# Altium PCB Gastroscopy-CutController.PcbDoc (part 3 of 3)
Units mm, origin at the board's own origin, x right, y up, seen from the top; angles counter-clockwise.
Board outline 69.5 x 69.5 mm, 4 copper layers (Top Layer, Layer 4 (GND), Layer 5 (PWR), Bottom Layer), stack 1.49 mm thick; 92 components, 63 nets, 304 pads, 96 vias.
Unrouted connection lines stored in the file: 142.
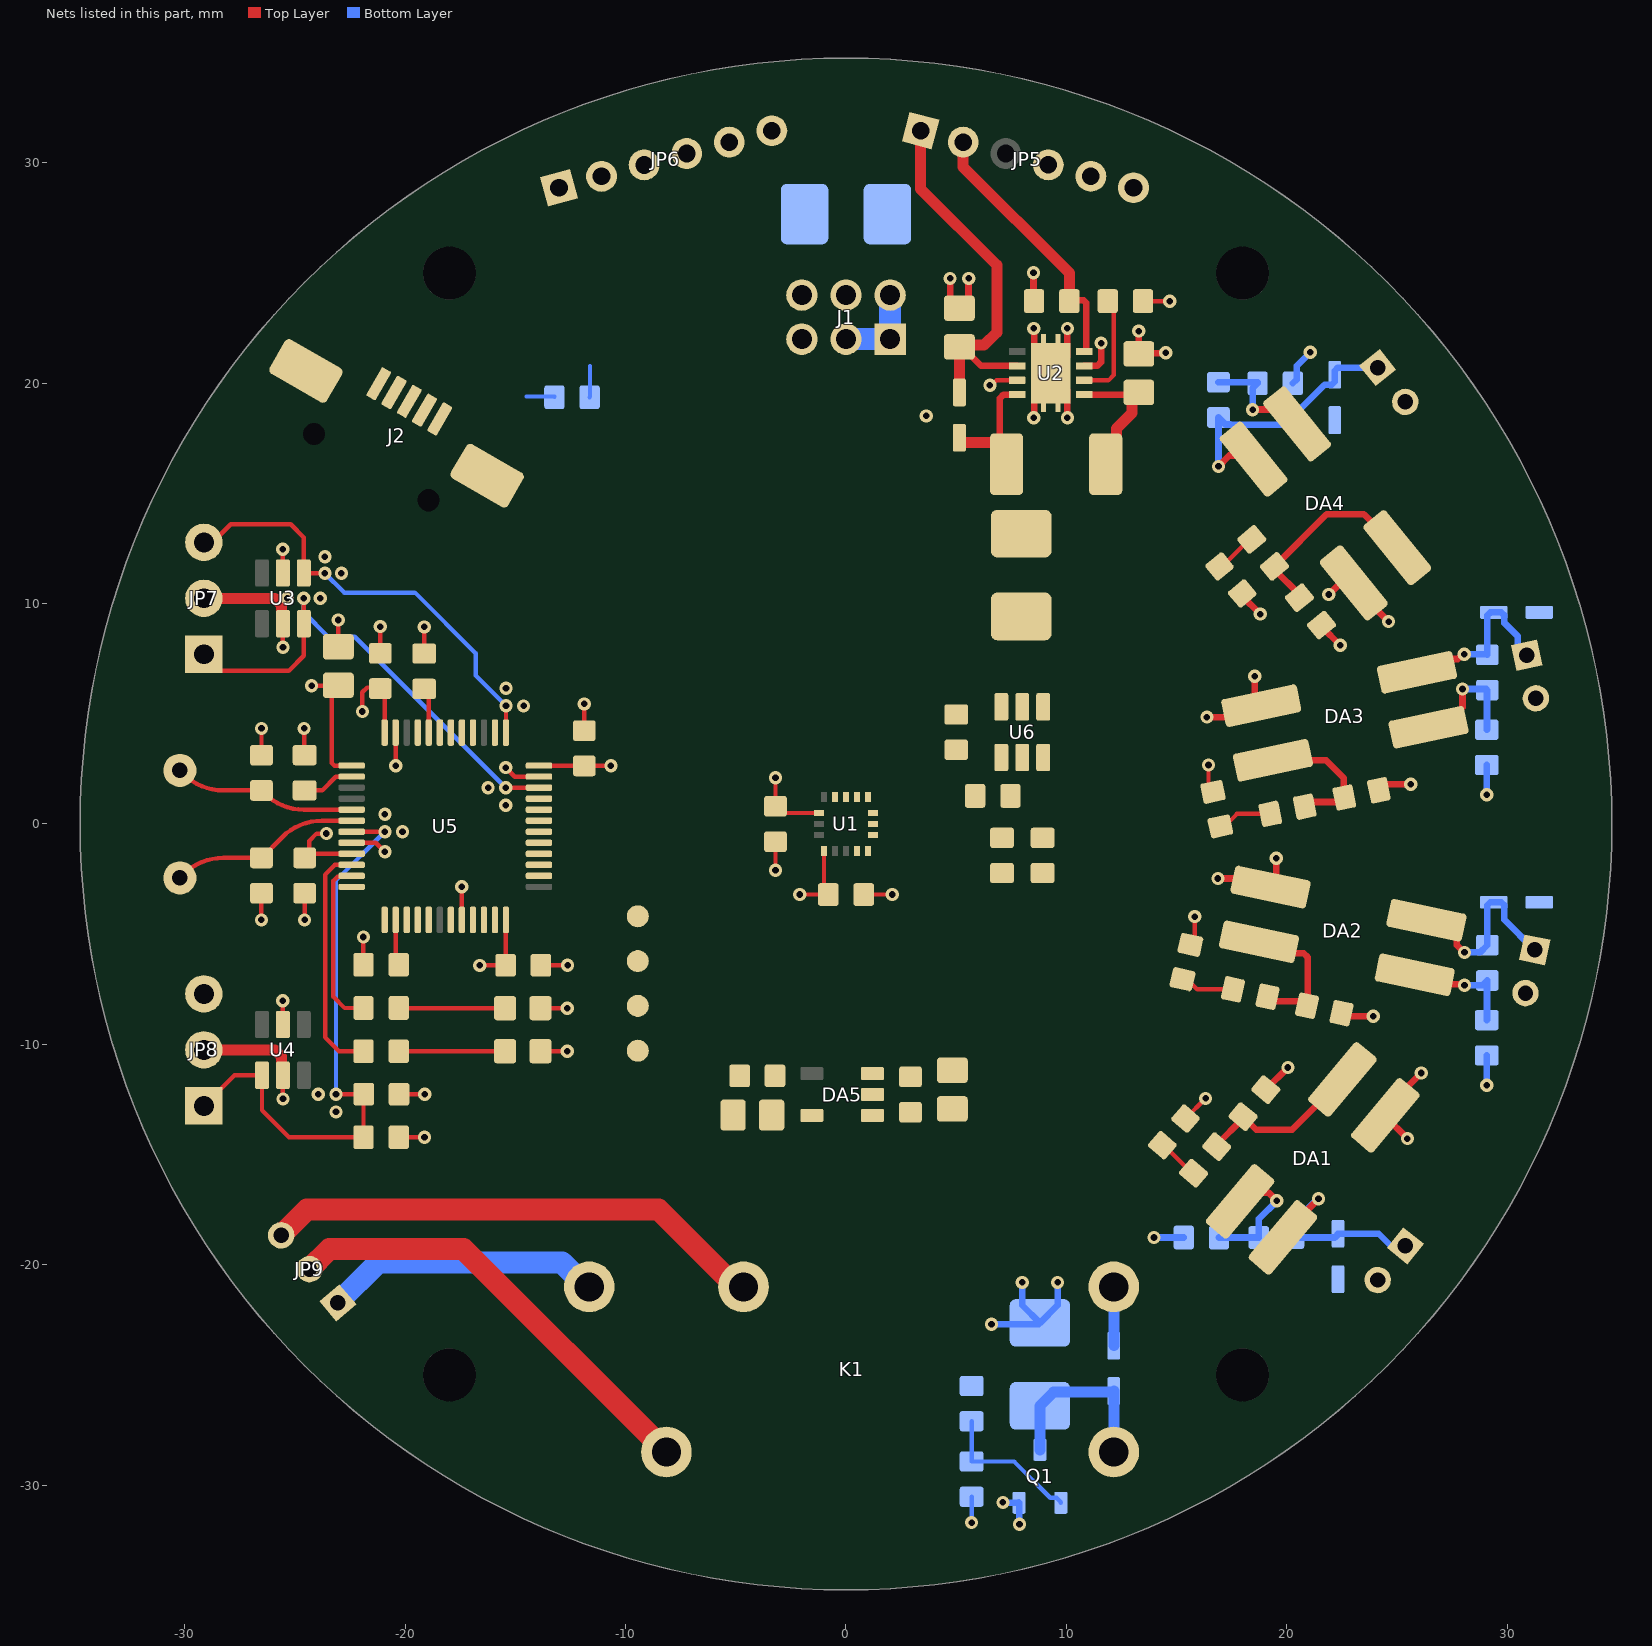
[diagram p2: the nets of this part, all layers, seen from the top]

## Via types
v1: diameter 0.6, hole 0.3, Top Layer to Bottom Layer, tented both sides, 96 vias

## Nets (pads, with @x,y where several pads share a name; then routed paths per layer and width w, separated by ;. In a path a pad name is that pad's centre, name@x,y a point inside that pad or via, vN(x,y) a via of type N, cw(c..) or ccw(c..) an arc to the next point about the centre after c; other vN are vias at no path point) (continued)
3V3: (continued)
  Top Layer w0.2: v1(-25.562,-8.022) -25.556,-8.028 -25.556,-9.019 U4.5@-25.55,-9.024 ; v1(-25.562,12.467) -25.556,12.461 -25.556,11.471 U3.5@-25.55,11.465 ; C16.1@-24.565,-1.538 -24.378,-1.351 U5.9@-22.432,-1.351 ; C16.1@-24.36,-1.369 -24.36,-0.772 -24.022,-0.434 -23.578,-0.434 v1(-23.576,-0.432) ; v1(-24.25,6.271) -23.038,6.271 C14.2@-23.035,6.269 ; C14.2@-23.035,6.294 -23.328,6.001 -23.328,2.766 -23.211,2.649 U5.1@-22.432,2.649 ; v1(-21.945,5.104) -21.945,5.974 -21.727,6.193 -21.181,6.193 C18.1@-21.132,6.144 -20.932,5.944 U5.48@-20.932,4.149 ; R17.1@-20.339,-14.21 -20.336,-14.213 v1(-19.124,-14.213) ; v1(-16.62,-6.416) -15.452,-6.416 C15.1@-15.445,-6.409 ; C15.1@-15.432,-6.396 U5.24@-15.432,-4.351 ; U5.36@-13.932,2.649 -11.887,2.649 C17.1@-11.874,2.636 ; C17.1@-11.883,2.645 -11.881,2.642 v1(-10.669,2.642) ; v1(-3.2,2.1) C2.1@-3.2,0.8 -2.9,0.5 U1.14@-1.225,0.5 ; v1(-2.1,-3.2) C1.1@-0.8,-3.2 -1,-3 U1.1@-1,-1.225
  Top Layer w0.3: R3.1@19.048,-12.053 v1(20.051,-11.05) ; R12.1@21.6,9.046 21.6,8.934 v1(22.425,8.109) ; R6.1@22.485,-8.581 22.629,-8.725 v1(23.925,-8.725) ; R9.1@24.178,1.536 24.443,1.8 v1(25.625,1.8)
5V: C11.2 C21.2 C22.1 D8.1 D10.2 D11.1 DA5.1 DA5.3 J1.1 J1.2 J1.3 J2.1 JP5.5 K1.A1 L1.1 R2.1 R5.1 R8.1 R11.1 U2.1 U6.5 | length 18.6
  Top Layer w0.3: U2.1@10.805,19.485 12.968,19.485 C11.2@13.185,19.485
  Top Layer w0.5: L1.1@11.785,16.327 12.266,16.808 12.266,17.948 12.968,18.65 12.968,19.268 C11.2@13.185,19.485
  Bottom Layer w0.3: v1(13.975,-18.764) R2.1@15.325,-18.764 ; R11.1@20.275,19.996 20.452,20.172 20.452,20.789 v1(21.07,21.407) ; v1(29.075,-11.85) R5.1@29.075,-10.5 ; v1(29.075,1.325) R8.1@29.075,2.675
  Bottom Layer w0.5: D8.1@12.15,-23.67 K1.A1@12.15,-21
  Bottom Layer w1: J1.3@0,22 J1.1@2,22 J1.2@2,24
ACCEL_CLK: U1.4 U5.15
ACCEL_CS: R1.1 U1.8 U5.14 | length 2.1
  Top Layer w0.2: U5.14@-20.432,-4.351 -20.432,-6.246 R1.1@-20.294,-6.384
ACCEL_INT1: U1.11 U5.12
ACCEL_INT2: U1.9 U5.13
ACCEL_MISO: U1.7 U5.16
ACCEL_MOSI: U1.6 U5.17
D_N: R24.2 U6.3
D_P: R25.2 R26.2 U6.1
GND: C1.2 C2.2 C4.2 C6.2 C8.2 C10.2 C11.1 C12.1 C13.2 C14.1 C15.2 C16.2 C17.2 C18.2 C19.2 C20.2 C21.1 C22.2 C23.2 C24.1 D1.2 D2.2 D3.2 D4.2 D6.2 D7.2 D9.2 D10.1 D11.2 DA1.3 DA2.3 DA3.3 DA4.3 DA5.2 J1.4 J1.5 J1.6 J2.5 J2.6 JP1.2 JP2.2 JP3.2 JP4.2 JP5.6 JP6.6 JP7.2 JP8.2 Q1.2 R1.2 R14.2 R15.2 R16.2 R18.1 R21.1 R23.2 R27.2 U1.5 U1.10 U1.12 U2.3 U2.9 U3.2 U4.2 U5.8 U5.20 U5.23 U5.35 U5.47 U6.2 | length 86.7
  Top Layer w0.2: v1(-26.528,-4.353) -26.528,-3.141 C20.2@-26.525,-3.138 ; C19.2@-26.525,3.124 -26.522,3.126 v1(-26.522,4.338) ; U4.2@-25.55,-11.449 -25.549,-11.45 v1(-25.548,-12.472) v1(-25.548,-12.472) ; U3.2@-25.55,9.04 -25.549,9.039 v1(-25.548,8.017) v1(-25.548,8.017) ; R21.1@-24.59,3.124 -24.588,3.126 v1(-24.588,4.338) ; v1(-24.565,-4.351) C16.2@-24.565,-3.138 C16.2@-24.562,-3.136 ; C14.1@-23.038,8.041 C14.1@-23.035,8.044 v1(-23.035,9.256) ; U5.8@-22.432,-0.851 -21.334,-0.851 v1(-20.924,-1.261) ; v1(-21.9,-5.125) -21.9,-6.379 R1.2@-21.894,-6.384 ; C18.2@-21.135,7.741 C18.2@-21.132,7.744 v1(-21.132,8.956) ; v1(-20.432,2.64) U5.47@-20.432,4.149 ; C13.2@-20.326,-12.256 -20.323,-12.258 v1(-19.111,-12.258) ; R18.1@-19.144,7.729 R18.1@-19.141,7.732 v1(-19.141,8.944) ; U5.20@-17.432,-4.351 v1(-17.432,-2.843) ; v1(-15.441,2.559) -15.031,2.149 U5.35@-13.932,2.149 ; D7.2@-13.865,-10.31 -13.862,-10.313 v1(-12.65,-10.313) ; D6.2@-13.865,-8.357 -13.862,-8.36 v1(-12.65,-8.36) ; C15.2@-13.848,-6.406 C15.2@-13.845,-6.409 v1(-12.633,-6.409) ; C17.2@-11.877,4.233 C17.2@-11.874,4.236 v1(-11.874,5.448) ; v1(-3.2,-2.1) C2.2@-3.2,-0.8 ; C1.2@0.8,-3.2 v1(2.1,-3.2) ; R16.2@8.506,23.756 R16.2@8.535,23.727 ; R15.2@13.477,23.727 13.48,23.725 v1(14.692,23.725) ; C4.2@15.402,-13.366 v1(16.318,-12.45) ; C6.2@15.629,-5.484 15.825,-5.288 v1(15.825,-4.2) ; v1(16.45,2.675) 16.45,1.661 C8.2@16.652,1.459
  Top Layer w0.3: v1(4.724,24.756) 4.731,24.749 4.731,23.816 C12.1@5.145,23.402 5.559,23.816 5.559,24.749 v1(5.566,24.756) ; R16.2@8.506,23.756 v1(8.506,25.012) ; v1(8.524,18.432) 8.535,18.443 8.535,19.71 U2.9@9.285,20.46 ; v1(8.524,22.488) 8.535,22.476 8.535,21.21 U2.9@9.285,20.46 ; v1(10.047,18.432) 10.035,18.443 10.035,19.71 U2.9@9.285,20.46 ; v1(10.047,22.488) 10.035,22.476 10.035,21.21 U2.9@9.285,20.46 ; U2.3@10.809,20.789 11.4,20.789 11.576,20.965 v1(11.576,21.821) ; v1(13.288,22.366) 13.288,21.338 C11.1@13.285,21.335 13.308,21.358 14.487,21.358 v1(14.51,21.381) ; v1(16.375,4.85) 18.316,4.85 DA3.3@18.841,5.375 18.55,5.666 v1(18.55,6.7) ; v1(16.875,-2.475) 18.883,-2.475 DA2.3@19.268,-2.859 19.525,-2.602 v1(19.525,-1.55) ; C10.2@17.975,10.462 17.975,10.35 v1(18.8,9.525) ; v1(21.91,10.416) 22.435,10.94 DA4.3@23.042,10.94 23.042,10.766 v1(24.622,9.186) ; v1(25.475,-14.275) 24.471,-13.271 DA1.3@24.471,-13.222 24.471,-12.929 v1(26.1,-11.3)
  Top Layer w0.5: JP8.2@-29.138,-10.249 -25.908,-10.249 -25.615,-10.542 -25.615,-11.334 U4.2@-25.55,-11.399 ; JP7.2@-29.138,10.24 -25.908,10.24 -25.615,9.947 -25.615,9.155 U3.2@-25.55,9.09
  Bottom Layer w0.19: -14.5,19.392 -13.241,19.392 R14.2@-13.233,19.383
  Bottom Layer w0.2: v1(5.7,-31.7) R23.2@5.7,-30.526
  Bottom Layer w0.3: v1(6.6,-22.7) 8.738,-22.7 D9.2@8.8,-22.638 ; v1(7.121,-30.782) 7.13,-30.791 7.823,-30.791 Q1.2@7.832,-30.782 ; Q1.2@7.85,-30.8 7.861,-30.811 7.861,-31.765 v1(7.872,-31.776) ; v1(8,-20.8) 8,-21.838 D9.2@8.8,-22.638 ; v1(9.6,-20.8) 9.6,-21.838 D9.2@8.8,-22.638
  other v1: -23.141,-13.063 -23.943,-12.261 -20.125,-0.351 -20.924,0.447 -15.441,0.85 -16.239,1.649 -14.631,5.36 -15.426,6.162 -25.353,10.246 -23.851,10.242 -22.898,11.376 -23.647,12.125 3.645,18.519
LED_ACT1: R19.1 U5.11 | length 7.8
  Top Layer w0.2: U5.11@-22.432,-2.351 -22.472,-2.391 -23.072,-2.391 -23.259,-2.578 -23.259,-7.841 -22.753,-8.347 R19.1@-21.894,-8.347
LED_ACT2: R20.1 U5.10 | length 10.8
  Top Layer w0.2: U5.10@-22.433,-1.85 -23.189,-1.85 -23.633,-2.294 -23.633,-9.683 -23.007,-10.31 R20.1@-21.894,-10.31
LED_DIM: R14.1 U2.7 U5.31 | length 2.7
  Top Layer w0.19: v1(6.529,19.904) 6.599,19.904 6.83,20.135 U2.7@7.765,20.135
  Bottom Layer w0.19: R14.1@-11.633,19.367 -11.616,19.383 -11.616,20.777
MCU_IN1: C4.1 R4.1 U5.28 | length 1.9
  Top Layer w0.2: C4.1@14.352,-14.574 14.43,-14.574 15.701,-15.845 R4.1@15.772,-15.845
MCU_IN2: C6.1 R7.1 U5.29 | length 2.5
  Top Layer w0.2: C6.1@15.269,-7.043 15.471,-7.043 15.931,-7.503 R7.1@17.558,-7.503
MCU_IN3: C8.1 R10.1 U5.27 | length 2.5
  Top Layer w0.2: C8.1@16.985,-0.106 17.176,-0.106 17.739,0.457 R10.1@19.251,0.457
MCU_IN4: C10.1 R13.1 U5.45 | length 2
  Top Layer w0.2: C10.1@16.947,11.688 17.07,11.688 18.295,12.913 R13.1@18.413,12.913
MCU_USB_D_N: R24.1 U5.32
MCU_USB_D_P: R25.1 U5.33
NetC3_1: C3.1 DA1.1 R2.2 | length 5.8
  Top Layer w0.3: DA1.1@17.881,-17.124 18.278,-16.727 19.177,-16.727 v1(19.55,-17.1)
  Bottom Layer w0.3: R2.2@16.925,-18.764 C3.1@18.725,-18.764 18.725,-17.925 v1(19.55,-17.1)
NetC3_2: C3.2 D1.1 DA1.2 JP1.1 | length 10
  Top Layer w0.3: DA1.2@19.826,-18.757 19.826,-18.62 v1(21.438,-17.008)
  Bottom Layer w0.3: v1(21.438,-17.008) 21.392,-17.008 20.425,-17.975 20.425,-18.663 C3.2@20.325,-18.764 22.185,-18.764 22.325,-18.624 D1.1@22.325,-18.595 24.172,-18.595 24.715,-19.138 JP1.1@25.383,-19.138
NetC5_1: C5.1 DA2.1 R5.2 | length 5.4
  Top Layer w0.3: DA2.1@25.807,-6.846 26.225,-7.264 28.006,-7.264 v1(28.064,-7.321)
  Bottom Layer w0.3: v1(28.064,-7.321) 28.879,-7.321 C5.1@29.088,-7.112 ; R5.2@29.075,-8.9 29.088,-8.887 C5.1@29.088,-7.112 ; C5.1@29.1,-7.1 C5.1@29.088,-7.112
NetC5_2: C5.2 D2.1 DA2.2 JP2.1 | length 9.1
  Top Layer w0.3: DA2.2@26.335,-4.361 26.903,-4.361 27.722,-5.18 27.722,-5.499 28.047,-5.825 v1(28.064,-5.825)
  Bottom Layer w0.3: v1@27.95,-5.825 v1(28.064,-5.825) 28.775,-5.825 C5.2@29.1,-5.5 29.1,-3.69 29.24,-3.55 D2.1@29.395,-3.55 29.735,-3.55 29.875,-3.69 29.875,-4.342 JP2.1@31.248,-5.715
NetC7_1: C7.1 DA3.1 R8.2 | length 5.7
  Top Layer w0.3: DA3.1@26.436,4.393 27.074,4.393 27.976,5.295 v1(27.976,6.124)
  Bottom Layer w0.3: v1(27.976,6.124) 29.051,6.124 C7.1@29.1,6.075 29.088,6.063 29.088,4.288 R8.2@29.075,4.275
NetC7_2: C7.2 D3.1 DA3.2 JP3.1 | length 8.4
  Top Layer w0.3: DA3.2@25.908,6.877 26.517,7.486 27.755,7.486 27.969,7.7 v1(28.05,7.7)
  Bottom Layer w0.3: v1(28.05,7.7) 29.073,7.7 29.099,7.674 C7.2@29.1,7.675 29.1,9.46 29.24,9.6 D3.1@29.395,9.6 29.735,9.6 29.875,9.46 29.875,9.12 30.489,8.506 30.489,8.061 JP3.1@30.889,7.661
NetC9_1: C9.1 DA4.1 R11.2 | length 5.4
  Top Layer w0.3: v1(18.45,18.8) 18.458,18.808 19.814,18.808 DA4.1@20.469,18.154
  Bottom Layer w0.3: C9.1@16.9,20.046 18.675,20.046 R11.2@18.675,19.996 18.45,19.77 v1(18.45,18.8)
NetC9_2: C9.2 D4.1 DA4.2 JP4.1 | length 12.8
  Top Layer w0.3: v1(16.9,16.225) 17.394,16.719 18.331,16.719 DA4.2@18.495,16.555
  Bottom Layer w0.3: v1(16.9,16.225) C9.2@16.9,18.446 17.22,18.126 17.429,18.126 17.441,18.114 19.9,18.114 21.717,19.931 22.035,19.931 22.175,20.071 22.175,20.567 22.315,20.707 JP4.1@24.122,20.707
NetC12_2: C12.2 D5.1 JP5.1 U2.6 | length 17.5
  Top Layer w0.3: C12.2@5.27,21.652 6.138,20.785 U2.6@7.765,20.785
  Top Layer w0.5: JP5.1@3.385,31.459 3.385,28.815 6.845,25.355 6.845,22.313 6.259,21.727 C12.2@5.245,21.727 ; D5.1@5.145,19.585 C12.2@5.145,21.652 C12.2@5.27,21.652
NetC19_1: C19.1 U5.5 Y1.2 | length 8.3
  Top Layer w0.2: Y1.2@-30.225,2.434 -30.059,2.268 ccw(c-28.263,4.064) -28.263,1.524 C19.1@-26.525,1.524 -26.394,1.393 ccw(c-24.598,3.189) -24.598,0.649 U5.5@-22.432,0.649
NetC20_1: C20.1 U5.6 Y1.1 | length 8.6
  Top Layer w0.2: Y1.1@-30.225,-2.446 -30.061,-2.282 cw(c-28.265,-4.078) -28.265,-1.538 C20.1@-26.525,-1.538 -25.582,-0.595 cw(c-23.786,-2.391) -23.786,0.149 U5.6@-22.432,0.149
NetD5_2: D5.2 L1.2 U2.8 | length 6.9
  Top Layer w0.3: L1.2@6.975,17.395 6.975,19.309 7.15,19.485 U2.8@7.765,19.485
  Top Layer w0.5: D5.2@5.145,17.525 5.145,17.346 5.185,17.306 6.785,17.306 7.285,16.806 L1.2@7.285,16.327 7.285,16.977 L1.2@6.935,17.327
NetD6_1: D6.1 R19.2 | length 4.8
  Top Layer w0.2: R19.2@-20.294,-8.347 -20.289,-8.352 -15.47,-8.352 D6.1@-15.465,-8.357
NetD7_1: D7.1 R20.2 | length 4.8
  Top Layer w0.2: R20.2@-20.294,-10.31 D7.1@-15.465,-10.31
NetD8_2: D8.2 D9.1 K1.A2 Q1.3 | length 8.4
  Bottom Layer w0.5: Q1.3@8.8,-28.4 D9.1@8.8,-26.398 9.414,-25.784 12.11,-25.784 D8.2@12.15,-25.744 ; K1.A2@12.15,-28.5 D8.2@12.15,-25.744 ; D8.2@12.15,-25.73 D8.2@12.15,-25.744
NetDA1_4: DA1.4 R3.2 R4.2 | length 7.6
  Top Layer w0.3: R4.2@16.822,-14.638 16.822,-14.556 18.02,-13.358 R3.2@18.02,-13.279 R3.2@18.02,-13.279 18.616,-13.874 20.241,-13.874 DA1.4@22.525,-11.59
NetDA2_4: DA2.4 R6.2 R7.2 | length 6.7
  Top Layer w0.3: DA2.4@18.74,-5.344 19.259,-5.863 20.769,-5.863 20.945,-6.039 20.945,-8.224 R6.2@20.92,-8.249 20.714,-8.042 19.329,-8.042 R7.2@19.123,-7.836
NetDA3_4: DA3.4 R9.2 R10.2 | length 6.4
  Top Layer w0.3: DA3.4@19.369,2.891 21.783,2.891 22.594,2.08 22.594,1.222 R9.2@22.613,1.203 22.407,0.997 21.022,0.997 R10.2@20.816,0.79
NetDA4_4: DA4.4 R12.2 R13.2 | length 9.1
  Top Layer w0.3: R12.2@20.572,10.272 20.572,10.408 19.441,11.538 R13.2@19.441,11.687 21.807,14.053 23.502,14.053 DA4.4@25.015,12.539
NetJ2_4: J2.4 R27.1
NetJP5_2: JP5.2 R16.1 U2.4 | length 12.3
  Top Layer w0.3: R16.1@10.135,23.727 10.174,23.766 10.778,23.766 10.895,23.649 10.895,23.349 10.895,21.495 10.835,21.435 U2.4@10.805,21.435
  Top Layer w0.5: JP5.2@5.317,30.941 5.317,29.815 10.135,24.997 R16.1@10.135,23.727
NetJP9_1: JP9.1 K1.14 | length 12.6
  Bottom Layer w1: JP9.1@-23.059,-21.729 -21.23,-19.9 -12.886,-19.9 -11.786,-21 K1.14@-11.65,-21
NetJP9_2: JP9.2 K1.11 | length 20.4
  Top Layer w1: JP9.2@-24.344,-20.197 -23.442,-19.294 -17.356,-19.294 K1.11@-8.15,-28.5
NetJP9_3: JP9.3 K1.12 | length 22.9
  Top Layer w1: JP9.3@-25.63,-18.665 -24.465,-17.5 -8.502,-17.5 -5.002,-21 K1.12@-4.65,-21
NetQ1_1: Q1.1 R22.2 R23.1 | length 6.7
  Bottom Layer w0.2: R22.2@5.7,-27.1 R23.1@5.7,-28.926 7.626,-28.926 9.267,-30.567 9.55,-30.567 9.75,-30.767 Q1.1@9.75,-30.8
NetR15_1: R15.1 U2.2 | length 4.9
  Top Layer w0.2: U2.2@10.805,20.135 10.813,20.127 11.907,20.127 12.154,20.374 12.154,22.927 12.154,23.451 R15.1@11.877,23.727
NetR18_2: R18.2 U5.44 | length 2.1
  Top Layer w0.2: R18.2@-19.141,6.132 -18.932,5.923 U5.44@-18.932,4.149
NetR21_2: R21.2 U5.2 | length 2.4
  Top Layer w0.2: R21.2@-24.565,1.524 -23.77,1.524 -23.15,2.143 -22.437,2.143 U5.2@-22.432,2.149
NetTP1_1: TP1.1 U5.38
NetTP2_1: TP2.1 U5.19
NetTP3_1: TP3.1 U5.21
NetTP4_1: TP4.1 U5.22
NRST: C13.1 JP8.1 R17.2 U4.1 U5.7 | length 27.5
  Top Layer w0.2: JP8.1@-29.138,-12.789 -27.748,-11.399 U4.1@-26.5,-11.399 -26.5,-12.987 -25.274,-14.213 R17.2@-21.894,-14.213 -21.892,-14.21 -21.892,-12.268 C13.1@-21.882,-12.258 -21.887,-12.264 v1(-23.141,-12.264) ; U5.7@-22.432,-0.351 v1(-20.924,-0.351)
  Bottom Layer w0.2: v1(-23.141,-12.264) -23.141,-2.569 v1(-20.924,-0.351)
RELAY: R22.1 U5.26
SENSOR_DIM: JP5.4 U5.30
SENSOR_EN: JP6.4 U5.40
SENSOR_INT: JP6.3 U5.41
SENSOR_SCL: JP6.2 U5.42
SENSOR_SDA: JP6.1 U5.43
SWCLK: JP7.3 U3.4 U5.37 | length 20.2
  Top Layer w0.2: JP7.3@-29.138,12.78 -28.732,12.78 -27.912,13.6 -25.2,13.6 -24.6,13 U3.4@-24.6,11.39 ; U3.4@-24.6,11.465 -24.511,11.376 v1(-23.647,11.376) ; U5.37@-15.432,4.149 -15.429,4.152 -15.429,5.36 v1(-15.426,5.363)
  Bottom Layer w0.2: v1(-23.647,11.376) -22.771,10.5 -19.56,10.5 -16.8,7.74 -16.8,6.737 v1(-15.426,5.363)
SWDIO: JP7.1 U3.3 U5.34 | length 22.4
  Top Layer w0.2: JP7.1@-29.138,7.7 -28.388,6.95 -25.279,6.95 -24.6,7.629 U3.3@-24.6,9.09 v1@-24.6,10.242 ; v1(-15.441,1.649) U5.34@-13.932,1.649
  Bottom Layer w0.2: v1(-24.604,10.246) -24.604,9.604 -23.5,8.5 -22.292,8.5 v1(-15.441,1.649)
USB_N: J2.2 U6.4
USB_P: J2.3 U6.6
pads on no net: DA5.4 J2. JP5.3 U1.2 U1.3 U1.13 U1.15 U1.16 U2.5 U3.1 U3.6 U4.3 U4.4 U4.6 U5.3 U5.4 U5.18 U5.25 U5.39 U5.46

## Polygon pours and split planes (outlines as drawn)
5V on Bottom Layer "5V_L04_P000" (solid, pour order 0): 0.8,28.777 0.8,22.9 -0.6,22.9 -0.6,20.6 ccw(c0,20.6) 0,20 3.2,20 ccw(c3.2,20.7) 3.9,20.7 3.9,28.3 ccw(c3.423,28.3) 3.423,28.777

## Silkscreen, mask and mechanical layers (free items; w line width, h text height)
Top Overlay:
  circle w0.1: c0,0 r33.901
  circle w0.2: c-18,-25 r2.5
  circle w0.2: c18,-25 r2.5
  circle w0.2: c18,25 r2.5
  circle w0.2: c-18,25 r2.5
  lines w0.05: -24.5,15.2 -6.163,4.531 ; -21.189,17.734 -2.853,7.065 ; -20.65,21.868 -2.313,11.2 ; -11.761,5.944 -0.994,-0.34 ; -30.225,2.434 -30.225,2.434 ; -30.225,2.434 -30.225,2.434
  text "B4" at 27.67,14.661 h3 r127
  text "B3" at 29.34,9.778 h3 r102
  text "B2" at 30.769,-3.149 h3 r77
  text "B1" at 26.145,-16.576 h3 r52
Board Outline:
  lines w0.013: -27.5,-17.5 -27.5,17.5 27.5,17.5 27.5,-17.5 -27.5,-17.5 ; -26.444,-25.521 ccw(c0,0) -15.816,-33.173 -14.107,-25.917 ccw(c-18,-25) -20.105,-21.598 -26.444,-25.521 ; -26.444,25.521 cw(c0,0) -15.816,33.173 -14.107,25.917 cw(c-18,25) -20.105,21.598 -26.444,25.521 ; 14.106,-25.917 cw(c18,-25) 20.104,-21.598 26.443,-25.521 cw(c0,0) 15.815,-33.173 14.106,-25.917 ; 14.106,25.917 ccw(c18,25) 20.104,21.598 26.443,25.521 ccw(c0,0) 15.815,33.173 14.106,25.917
  lines w0.1: -34.75,0 cw(c0,0) 0,34.75 cw(c0,0) 34.75,0 cw(c0,0) 0,-34.75 cw(c0,0) -34.75,0